# Altium PCB lcd-adapter.PcbDoc
Units mil, origin at the board's own origin, x right, y up, seen from the top; angles counter-clockwise.
Board outline 3100 x 1100 mil, 2 copper layers (Top Layer, Bottom Layer); 18 components, 37 nets, 104 pads, 50 vias.
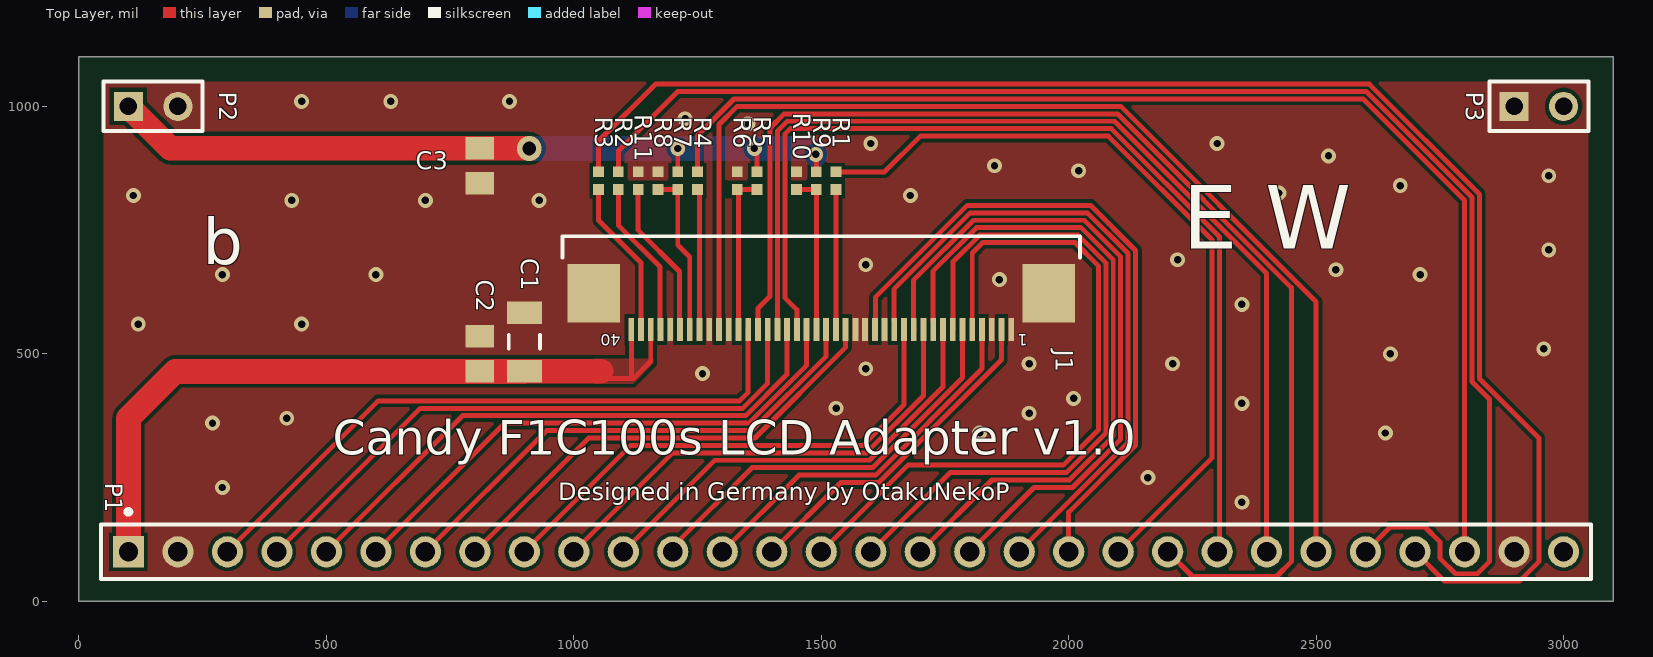
[diagram p0: Top Layer view]
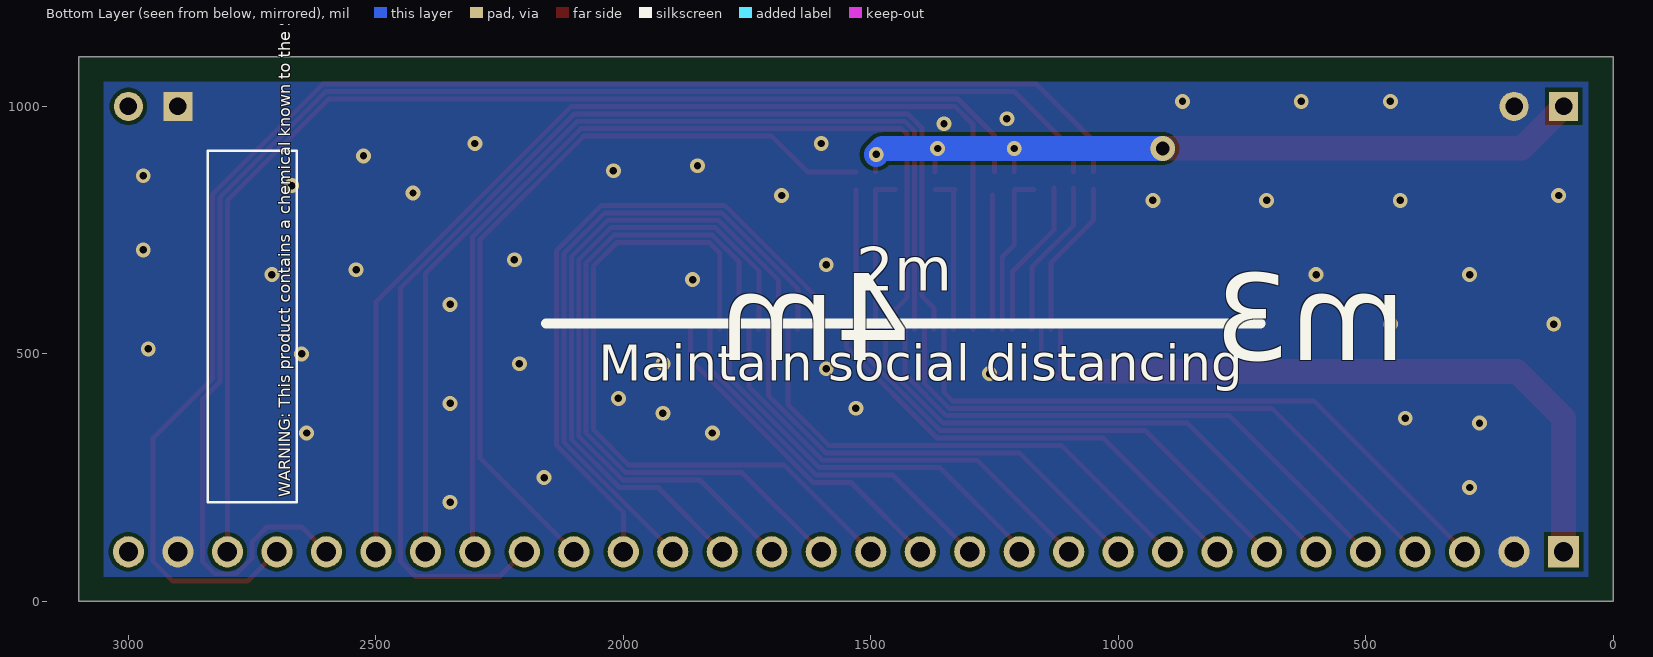
[diagram p1: Bottom Layer view, seen from below]
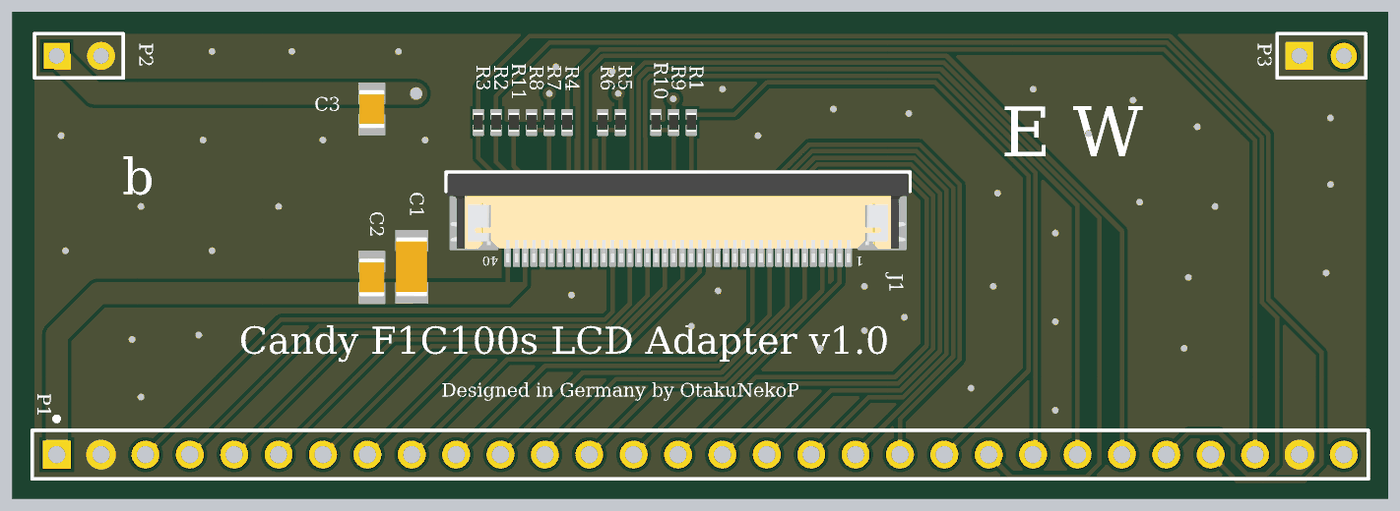
[diagram p2: 3D render of the assembled board from above, using the file's embedded part models]

## Layer stack, top to bottom
Top Solder: solder mask 0.4, Solder Resist, Dk 3.5
Top Layer: signal copper 1.4
Dielectric 1: dielectric 12.6, FR-4, Dk 4.8
Bottom Layer: signal copper 1.4
Bottom Solder: solder mask 0.4, Solder Resist, Dk 3.5

## Board outline
0,0 3100,0 3100,1100 0,1100

## Design rules (kind name [scope] priority, off if disabled: settings)
Clearance [All] p1: gap=7.87 ignorepadtopadclearanceinfootprint=TRUE except(5: Arc-Arc Arc-Track Track-Track; 10: Arc-Via Track-Via; 13: Arc-Hole Track-Hole SMDPad-Hole THPad-Hole Via-Hole Fill-Hole Poly-Hole Region-Hole)
DiffPairsRouting [All] p1: maxlimit=10 minlimit=3.5 mostfreqgap=10 toplayer_minwidth=3.5 toplayer_maxwidth=15 toplayer_prefwidth=15 bottomlayer_minwidth=3.5 bottomlayer_maxwidth=15 bottomlayer_prefwidth=15 maxuncoupledlength=500
HoleSize [All] p1: absolutevalues=TRUE maxlimit=248.03 minlimit=7.87 maxpercent=80.000 minpercent=20.000
HoleToHoleClearance [All] p1: gap=19.68 allowstackedmicrovias=TRUE
MinimumSolderMaskSliver [All] p1: minsoldermaskwidth=7.87
PasteMaskExpansion [All] p1: expansion=1.97
PlaneClearance [All] p1: clearance=7.87
PlaneConnect [All] p1: planeconnectstyle=Direct reliefexpansion=20 reliefentries=4 reliefconductorwidth=10 reliefairgap=10
PolygonConnect [All] p1: connectstyle=Direct reliefconductorwidth=10 reliefentries=4 polygonreliefangle="90 Angle" airgapwidth=10
RoutingCorners [All] p1: cornerstyle=Round minsetback=100 maxsetback=100
RoutingVias [All] p1: holewidth=15 width=30 viastyle="Through Hole" minholewidth=11.81 minwidth=23.62 maxholewidth=248.03 maxwidth=300
SilkToSilkClearance [All] p1: silktosilkclearance=0
SilkToSolderMaskClearance [IsPad] p1: minsilkscreentomaskgap=5.91 clearancetoexposedcopper=TRUE
SolderMaskExpansion [All] p1: expansion=1.97 istentingtop=FALSE
Width [All] p1: maxlimit=200 minlimit=5 preferedwidth=10
20 further rules are at their usual default settings.

## Components (designator, comment, footprint, x,y, rotation, side; value= is the part's Value field where it differs from the comment)
C1 "C1206_10u" C1206 900,524 r90 top value=10u
C2 "C0805_100n" C0805 810,500 r90 top value=100n
C3 "C0805_100n" C0805 810,880 r270 top value=100n
J1 "68714014522" 68714014522 1500,650 r180 top locked
P1 "Header 30" HDR1X30 100,100 r0 top locked
P2 "Header 2" HDR1X2 100,1000 r0 top locked
P3 "Header 2" HDR1X2 2900,1000 r0 top locked
R1 "R0402_22R" R0402 1530,850 r270 top value=22R
R2 "R0402_22R" R0402 1090,850 r270 top value=22R
R3 "R0402_22R" R0402 1050,850 r270 top value=22R
R4 "R0402" R0402 1250,850 r270 top value=_
R5 "R0402" R0402 1370,850 r270 top value=_
R6 "R0402" R0402 1330,850 r270 top value=_
R7 "R0402" R0402 1210,850 r270 top value=_
R8 "R0402" R0402 1170,850 r270 top value=_
R9 "R0402" R0402 1490,850 r270 top value=_
R10 "R0402" R0402 1450,850 r270 top value=_
R11 "R0402" R0402 1130,850 r270 top value=_

## Footprints (in the part's own frame and the unit in brackets; to place one, negate y for a bottom-side part, rotate by r counter-clockwise, add the part's x,y. Pads: shape width x height; smd on the part's side, far side on the other; paste and mask are expansions set on the pad)
68714014522 [mm] "ZIF Connectors, Horizontal, Bottom Contact, pitch 0.5mm, 40p"
  rect 0.3x1.2 smd: 1(-9.75,2.56) 2(-9.25,2.56) 3(-8.75,2.56) 4(-8.25,2.56) 5(-7.75,2.56) 6(-7.25,2.56) 7(-6.75,2.56) 8(-6.25,2.56) 9(-5.75,2.56) 10(-5.25,2.56) 11(-4.75,2.56) 12(-4.25,2.56) 13(-3.75,2.56) 14(-3.25,2.56) 15(-2.75,2.56) 16(-2.25,2.56) 17(-1.75,2.56) 18(-1.25,2.56) 19(-0.75,2.56) 20(-0.25,2.56) 21(0.25,2.56) 22(0.75,2.56) 23(1.25,2.56) 24(1.75,2.56) 25(2.25,2.56) 26(2.75,2.56) 27(3.25,2.56) 28(3.75,2.56) 29(4.25,2.56) 30(4.75,2.56) 31(5.25,2.56) 32(5.75,2.56) 33(6.25,2.56) 34(6.75,2.56) 35(7.25,2.56) 36(7.75,2.56) 37(8.25,2.56) 38(8.75,2.56) 39(9.25,2.56) 40(9.75,2.56)
  rect 2.7x3 smd: MP1(-11.68,0.7) MP2(11.68,0.7)
  silkscreen extent -13.27,-2.22 13.28,-1.12, body extent -13.2,-2.15 13.2,2.95, height 2.1
C0805 [mm]
  rect 1.15x1.45 smd: 1(-0.9,0) 2(0.9,0)
  body extent -1.1,-0.72 1.1,0.72, height 0.9
C1206 [mm]
  rect 1.15x1.8 smd: 1(-1.5,0) 2(1.5,0)
  silkscreen extent -0.35,-0.8 0.35,0.8, body extent -1.7,-0.9 1.7,0.9, height 1
HDR1X2 [mm] "Connector; Header; 2 Position"
  rect 1.5x1.5 hole 0.9: 1(0,0)
  round 1.5 hole 0.9: 2(2.54,0)
  silkscreen extent -1.27,-1.27 3.81,1.27
HDR1X30 [mm] "Connector; Header; 30 Position"
  rect 1.6x1.6 hole 0.99: 1(0,0)
  round 1.6 hole 0.99: 2(2.54,0) 3(5.08,0) 4(7.62,0) 5(10.16,0) 6(12.7,0) 7(15.24,0) 8(17.78,0) 9(20.32,0) 10(22.86,0) 11(25.4,0) 12(27.94,0) 13(30.48,0) 14(33.02,0) 15(35.56,0) 16(38.1,0) 17(40.64,0) 18(43.18,0) 19(45.72,0) 20(48.26,0) 21(50.8,0) 22(53.34,0) 23(55.88,0) 24(58.42,0) 25(60.96,0) 26(63.5,0) 27(66.04,0) 28(68.58,0) 29(71.12,0) 30(73.66,0)
  silkscreen extent -1.4,-1.4 75.06,2.17
R0402 [mm]
  rect 0.55x0.55 smd: 1(-0.45,0) 2(0.45,0)
  body extent -0.53,-0.28 0.53,0.28, height 0.4

## Part data
C1: library part CMP-003-0097-1, Dielectric=X7R, Hidden Value=C106, Manufacturer 1=Kemet, Manufacturer Part Number 1=C1206C106K4RAC, Tolerance=0.1%, Voltage Rating DC=16V, Component Type=Standard, Part Number=C1206_10u, Pin Count=2
C2 C3: library part CMP-003-0073-1, Dielectric=X7R, Hidden Value=C104, Manufacturer 1=Kemet, Manufacturer Part Number 1=C0805C104K3RAC, Tolerance=0.1%, Voltage Rating DC=25V, Component Type=Standard, Part Number=C0805_100n, Pin Count=2
J1: library part CMP-1502-01545-1, "SMT ZIF Connectors WR-FPC, Horizontal, Bottom Contact, pitch 0.5 mm, 40 pins", Contact Resistance=20mOhm, Manufacturer="Wurth Elektronik", Operating Temperature=-25to85degC, Rated Current=0.5A, Withstanding Voltage=250VAC, Working Voltage=50VAC, Contact Design=BottomContact, Datasheet URL=https://katalog.we-online.de/em/datasheet/68714014522.pdf, Manufacturer URL=http://www.we-online.de, Mounting Technology=SMT, Orientation=Horizontal, Package Reference=68714014522, Packaging=TapeandReel, Part Number=68714014522, Pin Number=40, Pitch=0.5mm, Publisher=WurthElektronik
P1: "Header, 30-Pin", LatestRevisionDate=17-Jul-2002, LatestRevisionNote="Re-released for DXP Platform.", Publisher="Altium Limited"
P2 P3: "Header, 2-Pin", LatestRevisionDate=17-Jul-2002, LatestRevisionNote="Re-released for DXP Platform.", Publisher="Altium Limited"
R1 R2 R3: library part CMP-004-0379-1, Manufacturer 1=Vishay, Manufacturer Part Number 1=CRCW040222R0FKED, Power Rating=62,5mW, Tolerance=1%, Component Type=Standard, Part Number=R0402_22R, Pin Count=2
R4 R5 R6 R7 R8 R9 R10 R11: library part CMP-004-0369-1, Manufacturer 1=Vishay, Manufacturer Part Number 1=CRCW0402____FKED, Power Rating=62,5mW, Tolerance=1%, Component Type=Standard, Part Number=R0402, Pin Count=2

## Via types
v1: diameter 30, hole 15, Top Layer to Bottom Layer, tented both sides, 49 vias
v2: diameter 50, hole 28, Top Layer to Bottom Layer, tented both sides, 1 vias

## Nets (pads, with @x,y where several pads share a name; then routed paths per layer and width w, separated by ;. In a path a pad name is that pad's centre, name@x,y a point inside that pad or via, vN(x,y) a via of type N, cw(c..) or ccw(c..) an arc to the next point about the centre after c; other vN are vias at no path point)
3V3: C3.1 P2.1 R5.1 R7.1 R9.1 | length 1561.5
  Top Layer w10: R7.1 v1(1210,915) ; v1(1365,915) 1365,909.59 1370,904.59 R5.1 ; v1(1489,903) 1490,902 R9.1
  Top Layer w50: P2.1 184.57,915.43 C3.1 909.57,915.43 v2(910,915)
  Bottom Layer w50: v2(910,915) v1(1210,915) 1477,915 v1(1489,903)
5V: C1.1 C2.1 J1.38 J1.40 P1.1 | length 1550.3
  Top Layer w10: 1054.94,464.94 1069.89,450 1120,450 ; J1.40 1116.14,453.86 1120,450 ; J1.38 1155.51,485.51 1120,450
  Top Layer w50: P1.1 100,370 194.57,464.57 C2.1 899.62,464.57 C1.1 1054.94,464.94
BL_EN: J1.29 R5.2 R6.2 | length 324.2
  Top Layer w10: J1.29 1332.68,829.61 R6.2 R5.2
GND: C1.2 C2.2 C3.2 J1.1 J1.3 J1.14 J1.16 J1.17 J1.30 J1.32 J1.36 J1.MP1 J1.MP2 P1.2 P1.29 P2.2 P3.1 R6.1 R8.1 R10.1 R11.1
  other v1: 2350,200 290,230 2160,250 1820,340 2640,340 270,360 420,370 1920,380 1530,390 2350,400 2010,410 1260,460 1590,470 1920,480 2210,480 2650,500 2960,510 120,560 450,560 2350,600 1860,650 290,660 600,660 2710,660 2540,670 1590,680 2220,690 2970,710 430,810 700,810 930,810 110,820 1680,820 2425,825 2670,840 2970,860 2020,870 1850,880 2525,900 1600,925 2300,925 1352,965 1225,975 450,1010 630,1010 870,1010
LCD_CLK: J1.19 R1.2 | length 282.6
  Top Layer w10: J1.19@1530,549.69 R1.2
LCD_CS: J1.21 R9.2 R10.2 | length 323.1
  Top Layer w10: R10.2 R9.2 1490,549.37 J1.21
LCD_D2: J1.28 P1.3 | length 1312.7
  Top Layer w10: P1.3 605,405 1335,405 1352.36,422.36 J1.28
LCD_D3: J1.26 P1.4 | length 1241.5
  Top Layer w10: P1.4 690,390 1341.21,390 1391.73,440.52 J1.26
LCD_D4: J1.24 P1.5 | length 1170.2
  Top Layer w10: P1.5 775,375 1347.43,375 1430.91,458.48 1430.91,510.91 1431.1,511.1 J1.24
LCD_D5: J1.22 P1.6 | length 1098.9
  Top Layer w10: P1.6 860,360 1353.64,360 1470.47,476.83 J1.22
LCD_D6: J1.20 P1.7 | length 1027.7
  Top Layer w10: P1.7 945,345 1359.85,345 1509.84,494.99 J1.20
LCD_D7: J1.18 P1.8 | length 956.4
  Top Layer w10: P1.8 1030,330 1366.07,330 1549.21,513.15 J1.18
LCD_D10: J1.12 P1.9 | length 1042.4
  Top Layer w10: P1.9 1115,315 1585,315 1667.32,397.32 J1.12
LCD_D11: J1.10 P1.10 | length 971.1
  Top Layer w10: P1.10 1200,300 1591.21,300 1706.69,415.48 J1.10
LCD_D12: J1.8 P1.11 | length 899.8
  Top Layer w10: P1.11 1285,285 1597.43,285 1746.06,433.64 J1.8
LCD_D13: J1.6 P1.12 | length 834.4
  Top Layer w10: P1.12 1200,110 1360,270 1603.64,270 1785.43,451.79 J1.6
LCD_D14: J1.4 P1.13 | length 757.3
  Top Layer w10: P1.13 1455,255 1609.85,255 1824.8,469.95 J1.4
LCD_D15: J1.2 P1.14 | length 686
  Top Layer w10: P1.14 1540,240 1616.07,240 1864.17,488.11 J1.2
LCD_D18: J1.5 P1.15 | length 1431.6
  Top Layer w10: P1.15 1675,275 1988.93,275 2060,346.07 2060,677.87 2012.87,725 1826.21,725 1805.12,703.9 J1.5
LCD_D19: J1.7 P1.16 | length 1410
  Top Layer w10: P1.16 1760,260 1995.15,260 2075,339.85 2075,684.08 2019.08,740 1820,740 1766.65,686.65 1766.65,550.12 J1.7
LCD_D20: J1.9 P1.17 | length 1389.2
  Top Layer w10: P1.17 1845,245 2001.36,245 2090,333.64 2090,690.29 2025.29,755 1813.79,755 1725.47,666.68 1725.47,567.83 1726.38,566.93 J1.9
LCD_D21: J1.11 P1.18 | length 1367.6
  Top Layer w10: J1.11 1686.1,550.12 1686.1,572.57 1686.1,648.53 1807.57,770 2031.51,770 2105,696.51 2105,327.43 2007.57,230 1930,230 P1.18
LCD_D22: J1.13 P1.19 | length 1346.8
  Top Layer w10: J1.13 1647.64,566.93 1646.73,567.83 1646.73,630.37 1801.36,785 2037.72,785 2120,702.72 2120,321.21 1900,101.21 P1.19
LCD_D23: J1.15 P1.20 | length 1370.6
  Top Layer w10: J1.15 1609.17,550.12 1609.17,614.03 1795.15,800 2043.93,800 2135,708.93 2135,315 2000,180 P1.20
LCD_DE: J1.27 P1.22 | length 2465
  Top Layer w10: J1.27 1372.05,592.05 1396.3,616.3 1396.3,956.3 1425,985 2098.64,985 2450,633.64 2450,80 2420,50 2250,50 P1.22
LCD_HSYNC: J1.23 P1.23 | length 2017
  Top Layer w10: J1.23 1450.79,589.21 1426.42,613.58 1426.42,816.01 1426.3,816.12 1426.3,943.87 1437.43,955 2086.21,955 2305,736.21 2305,105 P1.23
LCD_VSYNC: J1.25 P1.24 | length 2087.7
  Top Layer w10: J1.25 1411.42,809.79 1411.3,809.91 1411.3,950.09 1431.21,970 2092.43,970 2400,662.43 P1.24
PD18: P1.21 R1.1 | length 1585.6
  Top Layer w10: R1.1 1627.72,867.72 1700,940 2080,940 2290,730 2290,290 P1.21
PE6: J1.31 P1.25 | length 2304.5
  Top Layer w10: J1.31 1293.31,963.31 1330,1000 2104.85,1000 2500,604.85 P1.25
PE11: P1.26 R2.1 | length 2995.3
  Top Layer w10: R2.1 1090,910 1210,1030 2601.21,1030 2815,816.21 2815,696.21 2815,683.79 2815,443.79 2850,408.79 2850,80 2825.63,55.63 2781.62,55.63 2750,87.25 2750,120 2720,150 2650,150 P1.26
PE12: P1.27 R3.1 | length 3065.1
  Top Layer w10: R3.1 1050,930 1165,1045 2607.43,1045 2830,822.43 2830,702.43 2830,690 2830,450 2950,330 2950,80 2910.63,40.63 2759.37,40.63 P1.27
PWR_EN: J1.34 R7.2 R8.2 | length 333.1
  Top Layer w10: R8.2 R7.2 1210,720 1234.25,695.75 J1.34
Reset: P1.28 R4.1 | length 2449
  Top Layer w10: R4.1 1250,941.21 1323.79,1015 2595,1015 2800,810 P1.28
TP_INT: J1.35 R11.2 | length 320.7
  Top Layer w10: R11.2@1130,834.92 1130,750 1213.66,666.34 1213.66,550.12 J1.35
TP_RST: J1.33 R4.2 | length 271.7
  Top Layer w10: J1.33 1253.94,820.93
TWI0_SCK: J1.37 R2.2 | length 321.5
  Top Layer w10: R2.2@1090,835.45 1090,760 1174.29,675.71 1174.29,550.12 J1.37
TWI0_SDA: J1.39 R3.2 | length 319.6
  Top Layer w10: R3.2@1050,833.31 1050,770 1135.83,684.17 J1.39
pads on no net: P1.30 P3.2

## Polygon pours and split planes (outlines as drawn)
GND on Top Layer "GND_L01_P006" (solid, remove dead copper, pour order 6): 50,1050 50,50 3050,50 3050,1050
5V on Top Layer "5V_L01_P000" (solid, pour order 0): 1040,490 1160.51,490 1160.51,480.51 1120,440 1040,440
GND on Bottom Layer "GND_L02_P005" (solid, remove dead copper, pour order 5): 50,1050 50,50 3050,50 3050,1050

## Silkscreen, mask and mechanical layers (free items; w line width, h text height)
Top Overlay:
  text "E W" at 2230,670 h220
  text "b" at 250,650 h160
  text "Candy F1C100s LCD Adapter v1.0" at 513,273 h120
  text "Designed in Germany by OtakuNekoP" at 969,192 h60
Bottom Overlay:
  lines w5: 2660,200 2660,910 2840,910 2840,200 2660,200
  lines w20: 712,561 2156,561
  text "2m" at 1529,598 h150
  text "m3        4m" at 418,429 h300
  text "Maintain social distancing" at 2050,421 h125
  text "WARNING: This product contains a chemical known to the State of California to cause cancer. For more information, go to www.P65Warnings.ca.gov." at 2665,210 h40 r270
Mechanical 1:
  the board outline again, w10

## Text inside footprints (layer, text, board x,y; h text height)
J1: Top Overlay "1" at 1917.32,547.24 h40 r180; Top Overlay "40" at 1094.49,547.24 h40 r180